# Altium PCB 8088NoteBook2.PcbDoc
Units mil, origin at the board's own origin, x right, y up, seen from the top; angles counter-clockwise.
Board outline 25980 x 22460 mil, 2 copper layers (Top Layer, Bottom Layer); 46 components, 99 nets, 506 pads, 177 vias.
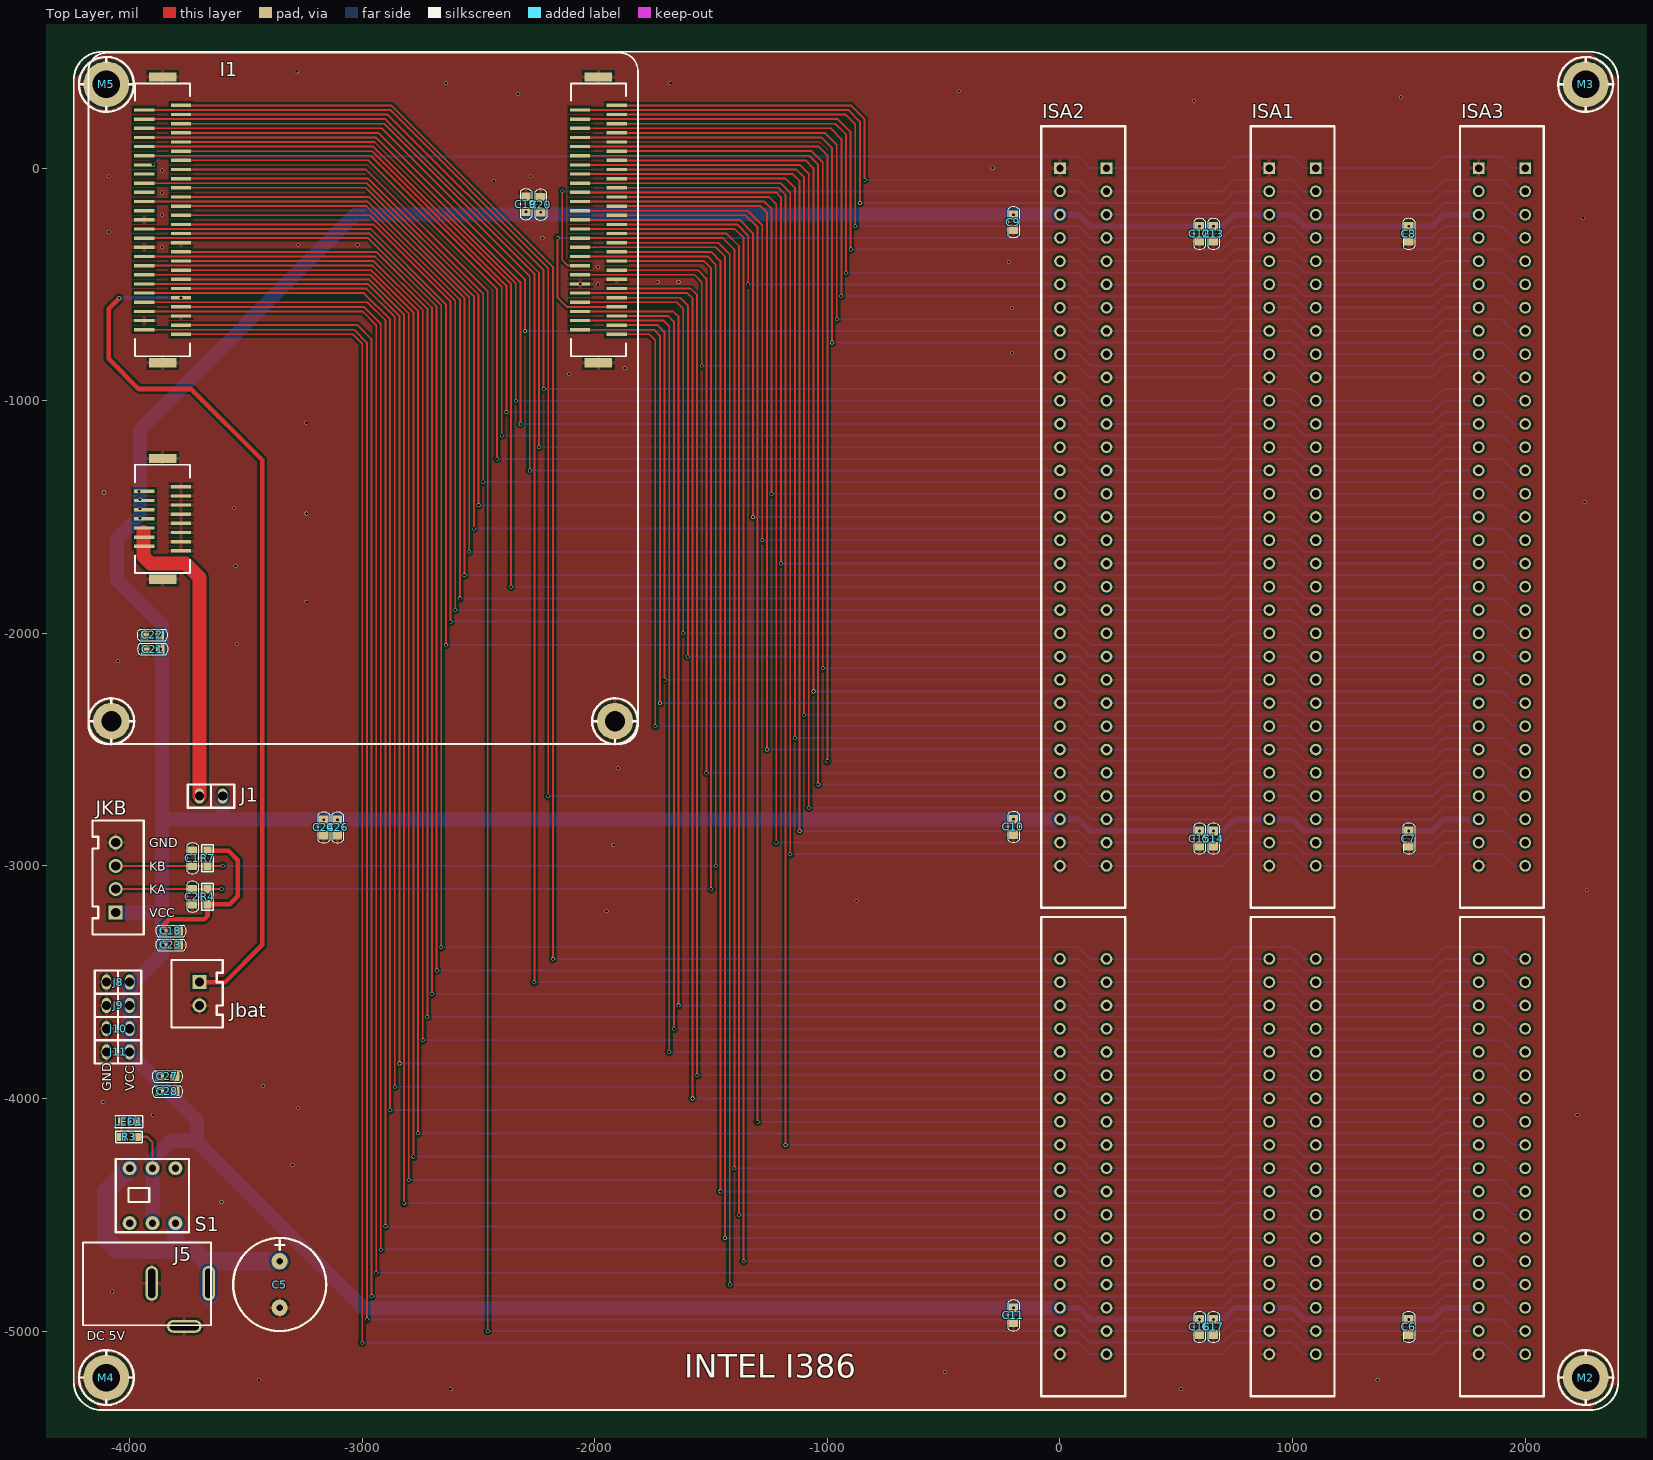
[diagram p0: Top Layer view]
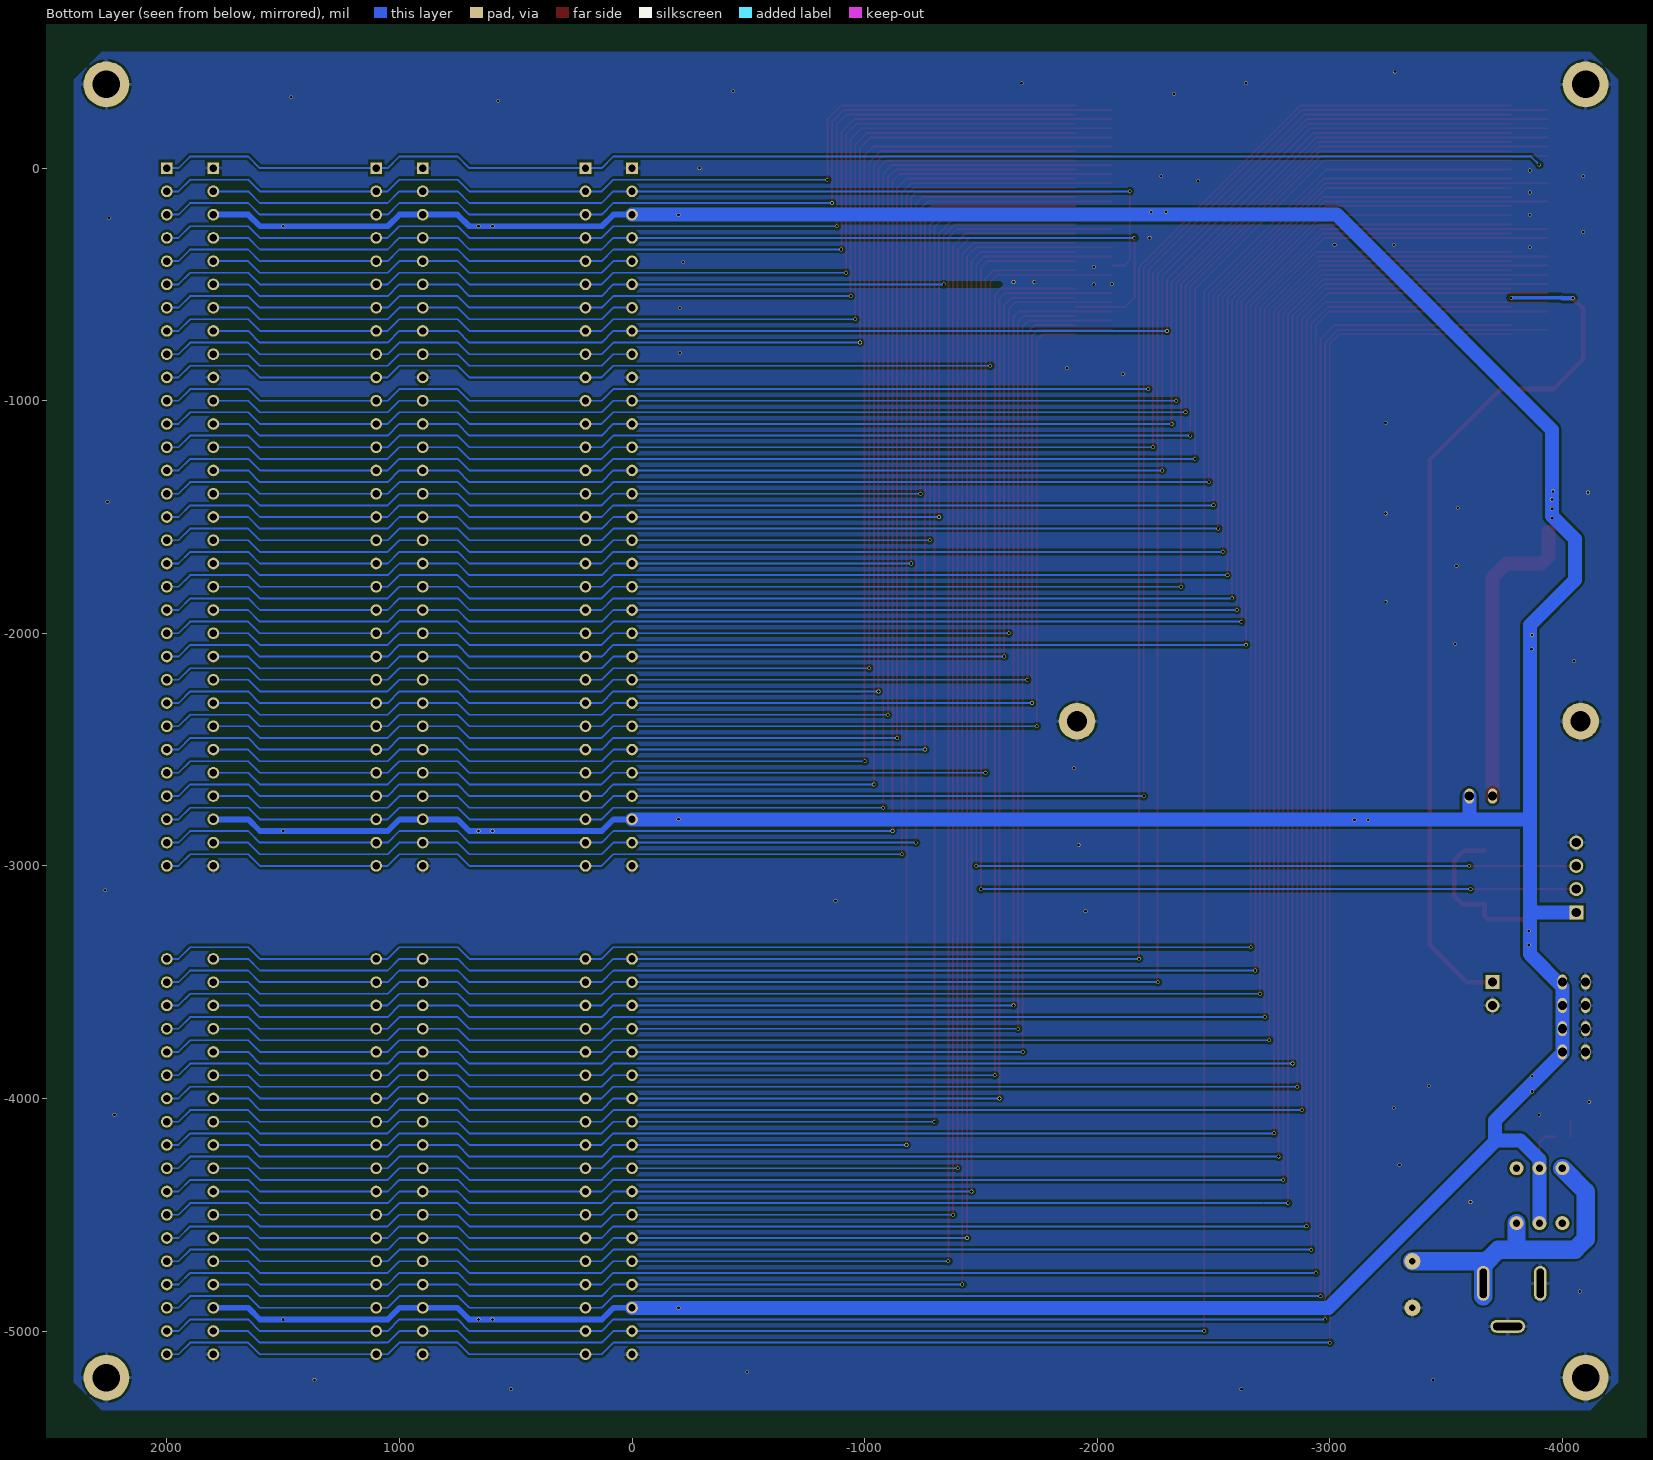
[diagram p1: Bottom Layer view, seen from below]

## Layer stack, top to bottom
Top Layer: signal copper 1.4
Dielectric: core 12.6, FR-4, Dk 4.8
Bottom Layer: signal copper 1.4

## Board outline
-12416.69,-16576.02 -12386.69,-16606.02 13563.31,-16606.02 13563.31,5523.98 13233.31,5853.98 12773.31,5393.98 -12086.69,5393.98

## Design rules (kind name [scope] priority, off if disabled: settings)
Clearance [All] p1: gap=8
ComponentClearance [All] p1: gap=10 collisioncheckmode=3 verticalgap=10
HoleSize [All] p1: absolutevalues=TRUE maxlimit=300 minlimit=11.81 maxpercent=80.000 minpercent=20.000
PlaneClearance [All] p1: clearance=15.75
PlaneConnect [All] p1: planeconnectstyle=Direct reliefexpansion=20 reliefentries=4 reliefconductorwidth=10 reliefairgap=10
PolygonConnect [All] p1: connectstyle=Relief reliefconductorwidth=15.75 reliefentries=4 polygonreliefangle="90 Angle"
RoutingVias [All] p1: holewidth=11.81 width=15.75 viastyle="Through Hole" minholewidth=11.81 minwidth=15.75 maxholewidth=11.81 maxwidth=15.75
SolderMaskExpansion [All] p1: expansion=4
TestPointUsage [All] p1: valid=0 allowmultiple=FALSE
Testpoint [All] p1: side=15 testpointundercomponent=TRUE minsize=40 maxsize=100 preferedsize=60 minholesize=0 maxholesize=40 preferedholesize=32 testpointgrid=1 style=1023 order=0123456789
Width [All] p1: maxlimit=393.7 minlimit=7.87 preferedwidth=10 toplayer_prefwidth=7.87 bottomlayer_prefwidth=7.87 minimp=50.000000 maximp=50.000000 favimp=50.000000
15 further rules are at their usual default settings.

## Components (designator, comment, footprint, x,y, rotation, side; value= is the part's Value field where it differs from the comment)
C1 "47pf" C0603 -3730,-3000 r90 top
C2 "47pf" C0603 -3730,-3100 r270 top
C5 "CAP1" RB.2/.4 -3355,-4800 r90 top
C6 "CAP" C0603 1500,-4950 r270 top
C7 "CAP" C0603 1500,-2850 r270 top
C8 "CAP" C0603 1500,-250 r270 top
C9 "CAP" C0603 -200,-200 r270 top
C10 "CAP" C0603 -200,-2800 r270 top
C11 "CAP" C0603 -200,-4900 r270 top
C12 "CAP" C0603 600,-250 r270 top
C13 "CAP" C0603 660,-250 r270 top
C14 "CAP" C0603 660,-2850 r270 top
C15 "CAP" C0603 600,-2850 r270 top
C16 "CAP" C0603 600,-4950 r270 top
C17 "CAP" C0603 660,-4950 r270 top
C18 "CAP" C0603 -3855,-3280 r0 top
C19 "CAP" C0603 -2295.94,-187.91 r90 top
C20 "CAP" C0603 -2232.95,-189.88 r90 top
C21 "CAP" C0603 -3867.8,-2068.23 r180 top
C22 "CAP" C0603 -3869.76,-2007.2 r180 top
C23 "CAP" C0603 -3855,-3340 r0 top
C24 "CAP" C0603 -3165.31,-2802.24 r270 top
C26 "CAP" C0603 -3106.26,-2802.24 r270 top
C27 "CAP" C0603 -3870,-3905 r0 top
C28 "CAP" C0603 -3870,-3970 r0 top
I1 "ALD386V10" MY-ALD386V10 -4078.74,-2377.95 r0 top
ISA1 "ISA" MY-ISA16-98 1100,0 r0 top
ISA2 "ISA" MY-ISA16-98 200,0 r0 top
ISA3 "ISA" MY-ISA16-98 2000,0 r0 top
J1 "CON2" SIP2 -3700,-2700 r0 top
J5 "DCIN" DC5.5-2.5 -3765,-4980 r0 top
J8 "CON2" SIP2 -4000,-3500 r180 top
J9 "CON2" SIP2 -4000,-3600 r180 top
J10 "CON2" SIP2 -4000,-3700 r180 top
J11 "CON2" SIP2 -4000,-3800 r180 top
Jbat "CON2" XH2.54-2 -3700,-3500 r270 top
JKB "CON4" XH2.54-4 -4060,-3200 r90 top
LED1 "POWER" LED0603 -4035,-4100 r0 top
M2 "CON1" M3 2260,-5200 r0 top
M3 "CON1" M3 2260,360 r0 top
M4 "CON1" M3 -4100,-5200 r0 top
M5 "CON1" M3 -4100,360 r0 top
R3 "10k" R0603 -4035,-4165 r0 top
R4 "22k" R0603 -3665,-3100 r270 top
R7 "22k" R0603 -3665,-3000 r90 top
S1 "POWER" "SW 8x8" -4000,-4300 r270 top

## Footprints (in the part's own frame and the unit in brackets; to place one, negate y for a bottom-side part, rotate by r counter-clockwise, add the part's x,y. Pads: shape width x height; smd on the part's side, far side on the other; paste and mask are expansions set on the pad)
C0603 [mil]
  rect 37.01x40 smd: 1(0,0)
  rect 37x40 smd: 2(64.98,0)
  silkscreen extent -34,-25 98,25
DC5.5-2.5 [mm]
  oval 1.4x3.8 hole 0.8 slot 3.2 at 90 deg: 1(2.667,4.699) 3(-3.556,4.699)
  oval 3.8x1.4 hole 0.8 slot 3.2 at 0 deg: 2(0,0)
  silkscreen extent -11.05,0.13 2.92,9.14
LED0603 [mm]
  rect 0.8x0.9 smd: 1(0,0) 2(1.7,0)
  silkscreen extent -0.68,-0.64 2.32,0.64
M3 [mm]
  round 5 hole 3: 1(0,0)
  silkscreen extent -3,-3 3,3
MY-ALD386V10 [mm]
  round 4 hole 2.2: 0(0,0) 0(55,0)
  rect 3x1 smd: 0(5.6,28.7) 0(5.6,15.5) 0(5.6,39.15) 0(5.6,70.35) 0(53.2,39.15) 0(53.2,70.35)
  rect 2.2x0.36 smd: 1(7.6,42.25) 2(7.6,43.25) 3(7.6,44.25) 4(7.6,45.25) 5(7.6,46.25) 6(7.6,47.25) 7(7.6,48.25) 8(7.6,49.25) 9(7.6,50.25) 10(7.6,51.25) 11(7.6,52.25) 12(7.6,53.25) 13(7.6,54.25) 14(7.6,55.25) 15(7.6,56.25) 16(7.6,57.25) 17(7.6,58.25) 18(7.6,59.25) 19(7.6,60.25) 20(7.6,61.25) 21(7.6,62.25) 22(7.6,63.25) 23(7.6,64.25) 24(7.6,65.25) 25(7.6,66.25) 26(7.6,67.25) 27(3.6,66.75) 28(3.6,65.75) 29(3.6,64.75) 30(3.6,63.75) 31(3.6,62.75) 32(3.6,61.75) 33(3.6,60.75) 34(3.6,59.75) 35(3.6,58.75) 36(3.6,57.75) 37(3.6,56.75) 38(3.6,55.75) 39(3.6,54.75) 40(3.6,53.75) 41(3.6,52.75) 42(3.6,51.75) 43(3.6,50.75) 44(3.6,49.75) 45(3.6,48.75) 46(3.6,47.75) 47(3.6,46.75) 48(3.6,45.75) 49(3.6,44.75) 50(3.6,43.75) 51(3.6,42.75) A1(55.2,42.25) A2(55.2,43.25) A3(55.2,44.25) A4(55.2,45.25) A5(55.2,46.25) A6(55.2,47.25) A7(55.2,48.25) A8(55.2,49.25) A9(55.2,50.25) A10(55.2,51.25) A11(55.2,52.25) A12(55.2,53.25) A13(55.2,54.25) A14(55.2,55.25) A15(55.2,56.25) A16(55.2,57.25) A17(55.2,58.25) A18(55.2,59.25) A19(55.2,60.25) A20(55.2,61.25) A21(55.2,62.25) A22(55.2,63.25) A23(55.2,64.25) A24(55.2,65.25) A25(55.2,66.25) A26(55.2,67.25) A27(51.2,66.75) A28(51.2,65.75) A29(51.2,64.75) A30(51.2,63.75) A31(51.2,62.75) A32(51.2,61.75) A33(51.2,60.75) A34(51.2,59.75) A35(51.2,58.75) A36(51.2,57.75) A37(51.2,56.75) A38(51.2,55.75) A39(51.2,54.75) A40(51.2,53.75) A41(51.2,52.75) A42(51.2,51.75) A43(51.2,50.75) A44(51.2,49.75) A45(51.2,48.75) A46(51.2,47.75) A47(51.2,46.75) A48(51.2,45.75) A49(51.2,44.75) A50(51.2,43.75) A51(51.2,42.75) B1(7.6,18.6) B2(7.6,19.6) B3(7.6,20.6) B4(7.6,21.6) B5(7.6,22.6) B6(7.6,23.6) B7(7.6,24.6) B8(7.6,25.6) B9(3.6,25.1) B10(3.6,24.1) B11(3.6,23.1) B12(3.6,22.1) B13(3.6,21.1) B14(3.6,20.1) B15(3.6,19.1)
  silkscreen extent -2.5,-2.51 57.5,73
MY-ISA16-98 [mm]
  rect 1.27x1.27 hole 0.8: A01(0,0) B01(-5.08,0)
  round 1.27 hole 0.8: A02(0,-2.54) A03(0,-5.08) A04(0,-7.62) A05(0,-10.16) A06(0,-12.7) A07(0,-15.24) A08(0,-17.78) A09(0,-20.32) A10(0,-22.86) A11(0,-25.4) A12(0,-27.94) A13(0,-30.48) A14(0,-33.02) A15(0,-35.56) A16(0,-38.1) A17(0,-40.64) A18(0,-43.18) A19(0,-45.72) A20(0,-48.26) A21(0,-50.8) A22(0,-53.34) A23(0,-55.88) A24(0,-58.42) A25(0,-60.96) A26(0,-63.5) A27(0,-66.04) A28(0,-68.58) A29(0,-71.12) A30(0,-73.66) A31(0,-76.2) B02(-5.08,-2.54) B03(-5.08,-5.08) B04(-5.08,-7.62) B05(-5.08,-10.16) B06(-5.08,-12.7) B07(-5.08,-15.24) B08(-5.08,-17.78) B09(-5.08,-20.32) B10(-5.08,-22.86) B11(-5.08,-25.4) B12(-5.08,-27.94) B13(-5.08,-30.48) B14(-5.08,-33.02) B15(-5.08,-35.56) B16(-5.08,-38.1) B17(-5.08,-40.64) B18(-5.08,-43.18) B19(-5.08,-45.72) B20(-5.08,-48.26) B21(-5.08,-50.8) B22(-5.08,-53.34) B23(-5.08,-55.88) B24(-5.08,-58.42) B25(-5.08,-60.96) B26(-5.08,-63.5) B27(-5.08,-66.04) B28(-5.08,-68.58) B29(-5.08,-71.12) B30(-5.08,-73.66) B31(-5.08,-76.2) C1(0,-86.36) C2(0,-88.9) C3(0,-91.44) C4(0,-93.98) C5(0,-96.52) C6(0,-99.06) C7(0,-101.6) C8(0,-104.14) C9(0,-106.68) C10(0,-109.22) C11(0,-111.76) C12(0,-114.3) C13(0,-116.84) C14(0,-119.38) C15(0,-121.92) C16(0,-124.46) C17(0,-127) C18(0,-129.54) D1(-5.08,-86.36) D2(-5.08,-88.9) D3(-5.08,-91.44) D4(-5.08,-93.98) D5(-5.08,-96.52) D6(-5.08,-99.06) D7(-5.08,-101.6) D8(-5.08,-104.14) D9(-5.08,-106.68) D10(-5.08,-109.22) D11(-5.08,-111.76) D12(-5.08,-114.3) D13(-5.08,-116.84) D14(-5.08,-119.38) D15(-5.08,-121.92) D16(-5.08,-124.46) D17(-5.08,-127) D18(-5.08,-129.54)
  silkscreen extent -7.11,-134.11 2.03,4.57
R0603 [mil]
  rect 38x35 smd: 1(0,0) 2(65,0)
  silkscreen extent -25,-25 90,25
RB.2/.4 [mil]
  round 70 hole 28: 1(100,0) 2(-100,0)
  silkscreen extent -200,-200 200,200
SIP2 [mil]
  oval 40x65 hole 39.37: 1(0,0) 2(100,0)
  silkscreen extent -50,-50 150,50
"SW 8x8" [mm]
  round 1.524 hole 0.8: 1(0,5) 2(0,2.5) 3(0,0) 4(6,0) 5(6,2.5) 6(6,5)
  silkscreen extent -1.02,-1.52 6.98,6.48
XH2.54-2 [mil]
  rect 60x60 hole 39.37: 1(0,0)
  round 60 hole 39.37: 2(100,0)
  silkscreen extent -95,-120 195,100
XH2.54-4 [mil]
  rect 60x60 hole 39.37: 1(0,0)
  round 60 hole 39.37: 2(100,0) 3(200,0) 4(300,0)
  silkscreen extent -95,-120 395,100

## Part data
C1 C2 C5: library part CAP
J5: "Connector"
LED1: library part LED
R3 R4 R7: library part RES2
S1: library part 双刀双柄开关

## Via types
v1: diameter 15.75, hole 11.81, Top Layer to Bottom Layer, 176 vias
v2: diameter 15, hole 11.81, Top Layer to Bottom Layer, 1 vias

## Nets (pads, with @x,y where several pads share a name; then routed paths per layer and width w, separated by ;. In a path a pad name is that pad's centre, name@x,y a point inside that pad or via, vN(x,y) a via of type N, cw(c..) or ccw(c..) an arc to the next point about the centre after c; other vN are vias at no path point)
12V: ISA1.B09 ISA2.B09 ISA3.B09 | length 1882.8
  Bottom Layer w7.87: ISA2.B09 80,-800 130,-850 700,-850 750,-800 1000,-800 1050,-850 1600,-850 1650,-800 ISA3.B09
206_VCC: I1.5 Jbat.1 | length 3806.8
  Top Layer w20: v1(-4045,-560) -4090,-605 -4090,-820 -3960,-950 -3735,-950 -3430,-1255 -3430,-3340 -3590,-3500 Jbat.1
  Bottom Layer w15: -3997.09,-557.09 v2(-3779.53,-557.09)
  Bottom Layer w20: v1(-4045,-560) -4000,-560 -3997.09,-557.09
-5V: ISA1.B05 ISA2.B05 ISA3.B05 | length 1882.8
  Bottom Layer w7.87: ISA2.B05 80,-400 130,-450 700,-450 750,-400 1000,-400 1050,-450 1600,-450 1650,-400 ISA3.B05
-12V: ISA1.B07 ISA2.B07 ISA3.B07 | length 1882.8
  Bottom Layer w7.87: ISA2.B07 80,-600 130,-650 700,-650 750,-600 1000,-600 1050,-650 1600,-650 1650,-600 ISA3.B07
DCIN: C5.1 J5.1 S1.3 S1.6 | length 1394.9
  Bottom Layer w7.87: -3675,-4700 -3674.09,-4700
  Bottom Layer w78.74: S1.3 -4100,-4400 -4100,-4605 -4055,-4650 -3725,-4650 -3660,-4715 J5.1@-3660,-4850 ; -3803.15,-4644.09 S1.6 ; -3674.09,-4700 C5.1
GND: C1.2 C2.2 C5.2 C6.2 C7.2 C8.2 C9.2 C10.2 C11.2 C12.2 C13.2 C14.2 C15.2 C16.2 C17.2 C18.2 C19.2 C20.2 C21.2 C22.2 C23.2 C24.2 C26.2 C27.2 C28.2 I1.0 I1.3 I1.11 I1.39 I1.42 I1.50 I1.A7 I1.A22 I1.A46 I1.B1 I1.B2 I1.B3 I1.B4 I1.B5 I1.B6 I1.B7 I1.B8 ISA1.B01 ISA1.B10 ISA1.B31 ISA1.D18 ISA2.B01 ISA2.B10 ISA2.B31 ISA2.D18 ISA3.B01 ISA3.B10 ISA3.B31 ISA3.D18 J5.2 J5.3 J8.2 J9.2 J10.2 J11.2 Jbat.2 JKB.4 LED1.2 M2.1 M3.1 M4.1 M5.1
  other v1: -2620,-5250 520,-5250 -3445,-5210 1365,-5210 -495,-5175 -4075,-4830 -3605,-4445 -3300,-4285 -3900,-4070 2225,-4070 -3275,-4040 -4115,-4015 -3425,-3945 -1950,-3195 -875,-3150 2265,-3105 -1920,-2910 -1900,-2580 -4050,-2120 -3540,-2045 -3240,-1865 -3545,-1710 -3240,-1485 -3550,-1460 2255,-1435 -4110,-1395 -3240,-1095 -2110,-885 -1870,-860 -205,-795 -205,-600 -1985,-500 -2062.99,-498.03 -1730,-490 -1640,-490 -1985,-425 -220,-405 -3860,-340 -3275,-330 -3020,-330 -2225,-300 -4090,-275 2250,-215 -3860,-200 -3860,-105 -2435,-55 -4090,-35 -2275,-35 -3860,-10 -290,0 575,290 1465,305 -2330,320 -435,330 -2640,365 -1675,365 -3280,415
ISA_*DACK0: I1.31 ISA1.B19 ISA2.B19 ISA3.B19 | length 7365.3
  Top Layer w7.87: I1.31 -2952.52,92.52 -2360,-500 v1(-2360,-1800)
  Bottom Layer w7.87: v1(-2360,-1800) 80,-1800 130,-1850 700,-1850 750,-1800 1000,-1800 1050,-1850 1600,-1850 1650,-1800 ISA3.B19
ISA_*DACK1: I1.A38 ISA1.B17 ISA2.B17 ISA3.B17 | length 5326.5
  Top Layer w7.87: I1.A38 -1341.93,-183.07 -1280,-245 v1(-1280,-1600)
  Bottom Layer w7.87: v1(-1280,-1600) 80,-1600 130,-1650 700,-1650 750,-1600 1000,-1600 1050,-1650 1600,-1650 1650,-1600 ISA3.B17
ISA_*DACK2: I1.A15 ISA1.B26 ISA2.B26 ISA3.B26 | length 6109.4
  Top Layer w7.87: I1.A15 -1286.61,-163.39 -1260,-190 v1(-1260,-2500)
  Bottom Layer w7.87: v1(-1260,-2500) 80,-2500 130,-2550 700,-2550 750,-2500 1000,-2500 1050,-2550 1600,-2550 1650,-2500 ISA3.B26
ISA_*DACK3: I1.A37 ISA1.B15 ISA2.B15 ISA3.B15 | length 5183.8
  Top Layer w7.87: I1.A37 -1271.3,-143.7 -1240,-175 v1(-1240,-1400)
  Bottom Layer w7.87: v1(-1240,-1400) 80,-1400 130,-1450 700,-1450 750,-1400 1000,-1400 1050,-1450 1600,-1450 1650,-1400 ISA3.B15
ISA_*IOCHCK: I1.33 ISA1.A01 ISA2.A01 ISA3.A01 | length 6018.1
  Bottom Layer w7.87: v1(-3900,15) -3865,50 80,50 130,0 700,0 750,50 1000,50 1050,0 1600,0 1650,50 1900,50 1950,0 ISA3.A01
ISA_*IOR: I1.29 ISA1.B14 ISA2.B14 ISA3.B14 | length 6918.4
  Top Layer w7.87: I1.29 -2916.26,171.26 -2280,-465 v1(-2280,-1300)
  Bottom Layer w7.87: v1(-2280,-1300) 80,-1300 130,-1350 700,-1350 750,-1300 1000,-1300 1050,-1350 1600,-1350 1650,-1300 ISA3.B14
ISA_*IOW: I1.28 ISA1.B13 ISA2.B13 ISA3.B13 | length 6843.5
  Top Layer w7.87: I1.28 -2900.63,210.63 -2240,-450 v1(-2240,-1200)
  Bottom Layer w7.87: v1(-2240,-1200) 80,-1200 130,-1250 700,-1250 750,-1200 1000,-1200 1050,-1250 1600,-1250 1650,-1200 ISA3.B13
ISA_*MEMR: I1.30 ISA1.B12 ISA2.B12 ISA3.B12 | length 6687.4
  Top Layer w7.87: I1.30 -2941.89,131.89 -2320,-490 v1(-2320,-1100)
  Bottom Layer w7.87: v1(-2320,-1100) 80,-1100 130,-1150 700,-1150 750,-1100 1000,-1100 1050,-1150 1600,-1150 1650,-1100 ISA3.B12
ISA_*MEMW: I1.22 ISA1.B11 ISA2.B11 ISA3.B11 | length 6418.9
  Top Layer w7.87: I1.22 -2947.2,112.2 -2340,-495 v1(-2340,-1000)
  Bottom Layer w7.87: v1(-2340,-1000) 80,-1000 130,-1050 700,-1050 750,-1000 1000,-1000 1050,-1050 1600,-1050 1650,-1000 ISA3.B11
ISA_A0: I1.A35 ISA1.A31 ISA2.A31 ISA3.A31 | length 7028.1
  Top Layer w7.87: I1.A35 -1200.04,-64.96 -1160,-105 v1(-1160,-2950)
  Bottom Layer w7.87: v1(-1160,-2950) 80,-2950 130,-3000 700,-3000 750,-2950 1000,-2950 1050,-3000 1600,-3000 1650,-2950 1900,-2950 1950,-3000 ISA3.A31
ISA_A1: I1.A34 ISA1.A30 ISA2.A30 ISA3.A30 | length 6973.7
  Top Layer w7.87: I1.A34 -1149.41,-25.59 -1120,-55 v1(-1120,-2850)
  Bottom Layer w7.87: v1(-1120,-2850) 80,-2850 130,-2900 700,-2900 750,-2850 1000,-2850 1050,-2900 1600,-2900 1650,-2850 1900,-2850 1950,-2900 ISA3.A30
ISA_A2: I1.A33 ISA1.A29 ISA2.A29 ISA3.A29 | length 6907.6
  Top Layer w7.87: I1.A33 -1118.78,13.78 -1080,-25 v1(-1080,-2750)
  Bottom Layer w7.87: v1(-1080,-2750) 80,-2750 130,-2800 700,-2800 750,-2750 1000,-2750 1050,-2800 1600,-2800 1650,-2750 1900,-2750 1950,-2800 ISA3.A29
ISA_A3: I1.A32 ISA1.A28 ISA2.A28 ISA3.A28 | length 6847.3
  Top Layer w8: I1.A32 -1078.15,53.15 -1040,15 v1(-1040,-2650)
  Bottom Layer w7.87: v1(-1040,-2650) 80,-2650 130,-2700 700,-2700 750,-2650 1000,-2650 1050,-2700 1600,-2700 1650,-2650 1900,-2650 1950,-2700 ISA3.A28
ISA_A4: I1.A31 ISA1.A27 ISA2.A27 ISA3.A27 | length 6787.1
  Top Layer w8: I1.A31 -1037.52,92.52 -1000,55 v1(-1000,-2550)
  Bottom Layer w7.87: v1(-1000,-2550) 80,-2550 130,-2600 700,-2600 750,-2550 1000,-2550 1050,-2600 1600,-2600 1650,-2550 1900,-2550 1950,-2600 ISA3.A27
ISA_A5: I1.A18 ISA1.A26 ISA2.A26 ISA3.A26 | length 6390.5
  Top Layer w8: I1.A18 -1179.72,-45.28 -1140,-85 v1(-1140,-2450)
  Bottom Layer w7.87: -1023.62,-2450 80,-2450 130,-2500 700,-2500 750,-2450 1000,-2450 1050,-2500 1600,-2500 1650,-2450 1900,-2450 1950,-2500 ISA3.A26
  Bottom Layer w8: v1(-1140,-2450) -1023.62,-2450
ISA_A6: I1.A19 ISA1.A25 ISA2.A25 ISA3.A25 | length 6333.2
  Top Layer w8: I1.A19 -1134.09,-5.91 -1100,-40 v1(-1100,-2350)
  Bottom Layer w7.87: v1(-1100,-2350) 80,-2350 130,-2400 700,-2400 750,-2350 1000,-2350 1050,-2400 1600,-2400 1650,-2350 1900,-2350 1950,-2400 ISA3.A25
ISA_A7: I1.A20 ISA1.A24 ISA2.A24 ISA3.A24 | length 6272.9
  Top Layer w8: I1.A20 -1093.46,33.46 -1060,0 v1(-1060,-2250)
  Bottom Layer w7.87: -984.25,-2250 80,-2250 130,-2300 700,-2300 750,-2250 1000,-2250 1050,-2300 1600,-2300 1650,-2250 1900,-2250 1950,-2300 ISA3.A24
  Bottom Layer w8: v1(-1060,-2250) -984.25,-2250
ISA_A8: I1.A21 ISA1.A23 ISA2.A23 ISA3.A23 | length 6203.9
  Top Layer w8: I1.A21 -1067.83,72.83 -1020,25 v1(-1020,-2150)
  Bottom Layer w7.87: v1(-1020,-2150) 80,-2150 130,-2200 700,-2200 750,-2150 1000,-2150 1050,-2200 1600,-2200 1650,-2150 1900,-2150 1950,-2200 ISA3.A23
ISA_A9: I1.40 ISA1.A22 ISA2.A22 ISA3.A22 | length 7639.4
  Top Layer w7.87: I1.40 -2963.19,-261.81 -2640,-585 v1(-2640,-2050)
  Bottom Layer w7.87: v1(-2640,-2050) 80,-2050 130,-2100 700,-2100 750,-2050 1000,-2050 1050,-2100 1600,-2100 1650,-2050 1900,-2050 1950,-2100 ISA3.A22
ISA_A10: I1.13 ISA1.A21 ISA2.A21 ISA3.A21 | length 7396
  Top Layer w7.87: I1.13 -2952.87,-242.13 -2620,-575 v1(-2620,-1950)
  Bottom Layer w7.87: v1(-2620,-1950) 80,-1950 130,-2000 700,-2000 750,-1950 1000,-1950 1050,-2000 1600,-2000 1650,-1950 1900,-1950 1950,-2000 ISA3.A21
ISA_A11: I1.15 ISA1.A20 ISA2.A20 ISA3.A20 | length 7334.4
  Top Layer w7.87: I1.15 -2981.61,-163.39 -2580,-565 v1(-2580,-1850)
  Bottom Layer w7.87: v1(-2580,-1850) 80,-1850 130,-1900 700,-1900 750,-1850 1000,-1850 1050,-1900 1600,-1900 1650,-1850 1900,-1850 1950,-1900 ISA3.A20
ISA_A12: I1.37 ISA1.A19 ISA2.A19 ISA3.A19 | length 7403
  Top Layer w7.87: I1.37 -2976.3,-143.7 -2560,-560 v1(-2560,-1750)
  Bottom Layer w7.87: v1(-2560,-1750) 80,-1750 130,-1800 700,-1800 750,-1750 1000,-1750 1050,-1800 1600,-1800 1650,-1750 1900,-1750 1950,-1800 ISA3.A19
ISA_A13: I1.16 ISA1.A18 ISA2.A18 ISA3.A18 | length 7156.6
  Top Layer w7.87: I1.16 -2970.98,-124.02 -2540,-555 v1(-2540,-1650)
  Bottom Layer w7.87: v1(-2540,-1650) 80,-1650 130,-1700 700,-1700 750,-1650 1000,-1650 1050,-1700 1600,-1700 1650,-1650 1900,-1650 1950,-1700 ISA3.A18
ISA_A14: I1.17 ISA1.A17 ISA2.A17 ISA3.A17 | length 7075.8
  Top Layer w7.87: I1.17 -2985.35,-84.65 -2520,-550 v1(-2520,-1550)
  Bottom Layer w7.87: v1(-2520,-1550) 80,-1550 130,-1600 700,-1600 750,-1550 1000,-1550 1050,-1600 1600,-1600 1650,-1550 1900,-1550 1950,-1600 ISA3.A17
ISA_A15: I1.35 ISA1.A16 ISA2.A16 ISA3.A16 | length 7144.4
  Top Layer w7.87: I1.35 -2980.04,-64.96 -2500,-545 v1(-2500,-1450)
  Bottom Layer w7.87: v1(-2500,-1450) 80,-1450 130,-1500 700,-1500 750,-1450 1000,-1450 1050,-1500 1600,-1500 1650,-1450 1900,-1450 1950,-1500 ISA3.A16
ISA_A16: I1.18 ISA1.A15 ISA2.A15 ISA3.A15 | length 6898
  Top Layer w7.87: I1.18 -2974.72,-45.28 -2480,-540 v1(-2480,-1350)
  Bottom Layer w7.87: v1(-2480,-1350) 80,-1350 130,-1400 700,-1400 750,-1350 1000,-1350 1050,-1400 1600,-1400 1650,-1350 1900,-1350 1950,-1400 ISA3.A15
ISA_A17: I1.20 ISA1.A14 ISA2.A14 ISA3.A14 | length 6842.3
  Top Layer w7.87: I1.20 -2973.46,33.46 -2420,-520 v1(-2420,-1250)
  Bottom Layer w7.87: v1(-2420,-1250) 80,-1250 130,-1300 700,-1300 750,-1250 1000,-1250 1050,-1300 1600,-1300 1650,-1250 1900,-1250 1950,-1300 ISA3.A14
ISA_A18: I1.32 ISA1.A13 ISA2.A13 ISA3.A13 | length 6913.8
  Top Layer w7.87: I1.32 -2963.15,53.15 -2400,-510 v1(-2400,-1150)
  Bottom Layer w7.87: v1(-2400,-1150) 80,-1150 130,-1200 700,-1200 750,-1150 1000,-1150 1050,-1200 1600,-1200 1650,-1150 1900,-1150 1950,-1200 ISA3.A13
ISA_A19: I1.21 ISA1.A12 ISA2.A12 ISA3.A12 | length 6667.4
  Top Layer w7.87: I1.21 -2957.83,72.83 -2380,-505 v1(-2380,-1050)
  Bottom Layer w7.87: v1(-2380,-1050) 80,-1050 130,-1100 700,-1100 750,-1050 1000,-1050 1050,-1100 1600,-1100 1650,-1050 1900,-1050 1950,-1100 ISA3.A12
ISA_AEN: I1.25 ISA1.A11 ISA2.A11 ISA3.A11 | length 6670.7
  Top Layer w7.87: I1.25 -2890.31,230.31 -2220,-440 v1(-2220,-950)
  Bottom Layer w7.87: v1(-2220,-950) 80,-950 130,-1000 700,-1000 750,-950 1000,-950 1050,-1000 1600,-1000 1650,-950 1900,-950 1950,-1000 ISA3.A11
ISA_ALE: I1.27 ISA1.B28 ISA2.B28 ISA3.B28 | length 8371.5
  Top Layer w7.87: I1.27 -2880,250 -2200,-430 v1(-2200,-2700)
  Bottom Layer w7.87: v1(-2200,-2700) 80,-2700 130,-2750 700,-2750 750,-2700 1000,-2700 1050,-2750 1600,-2750 1650,-2700 ISA3.B28
ISA_B8: I1.23 ISA1.B08 ISA2.B08 ISA3.B08 | length 6144
  Top Layer w7.87: I1.23 -2931.57,151.57 -2300,-480 v1(-2300,-700)
  Bottom Layer w7.87: v1(-2300,-700) 80,-700 130,-750 700,-750 750,-700 1000,-700 1050,-750 1600,-750 1650,-700 ISA3.B08
ISA_CLK86: I1.14 ISA1.B20 ISA2.B20 ISA3.B20 | length 7144.5
  Top Layer w7.87: I1.14 -2967.24,-202.76 -2600,-570 v1(-2600,-1900)
  Bottom Layer w7.87: v1(-2600,-1900) 80,-1900 130,-1950 700,-1950 750,-1900 1000,-1900 1050,-1950 1600,-1950 1650,-1900 ISA3.B20
ISA_D0: I1.A30 ISA1.A09 ISA2.A09 ISA3.A09 | length 5021
  Top Layer w7.87: I1.A30 -1026.89,131.89 -980,85 v1(-980,-750)
  Bottom Layer w7.87: v1(-980,-750) 80,-750 130,-800 700,-800 750,-750 1000,-750 1050,-800 1600,-800 1650,-750 1900,-750 1950,-800 ISA3.A09
ISA_D1: I1.A23 ISA1.A08 ISA2.A08 ISA3.A08 | length 4780.4
  Top Layer w7.87: I1.A23 -1011.57,151.57 -960,100 v1(-960,-650)
  Bottom Layer w7.87: v1(-960,-650) 80,-650 130,-700 700,-700 750,-650 1000,-650 1050,-700 1600,-700 1650,-650 1900,-650 1950,-700 ISA3.A08
ISA_D2: I1.A29 ISA1.A07 ISA2.A07 ISA3.A07 | length 4860.7
  Top Layer w7.87: I1.A29 -986.26,171.26 -940,125 v1(-940,-550)
  Bottom Layer w7.87: v1(-940,-550) 80,-550 130,-600 700,-600 750,-550 1000,-550 1050,-600 1600,-600 1650,-550 1900,-550 1950,-600 ISA3.A07
ISA_D3: I1.A24 ISA1.A06 ISA2.A06 ISA3.A06 | length 4623.1
  Top Layer w7.87: I1.A24 -965.94,190.94 -920,145 v1(-920,-450)
  Bottom Layer w7.87: v1(-920,-450) 80,-450 130,-500 700,-500 750,-450 1000,-450 1050,-500 1600,-500 1650,-450 1900,-450 1950,-500 ISA3.A06
ISA_D4: I1.A28 ISA1.A05 ISA2.A05 ISA3.A05 | length 4694.6
  Top Layer w7.87: I1.A28 -955.63,210.63 -900,155 v1(-900,-350)
  Bottom Layer w7.87: v1(-900,-350) 80,-350 130,-400 700,-400 750,-350 1000,-350 1050,-400 1600,-400 1650,-350 1900,-350 1950,-400 ISA3.A05
ISA_D5: I1.A25 ISA1.A04 ISA2.A04 ISA3.A04 | length 4465.2
  Top Layer w7.87: I1.A25 -921.26,230.31 -880,189.06 v1(-880,-250)
  Bottom Layer w7.87: v1(-880,-250) 80,-250 130,-300 700,-300 750,-250 1000,-250 1050,-300 1600,-300 1650,-250 1900,-250 1950,-300 ISA3.A04
ISA_D6: I1.A27 ISA1.A03 ISA2.A03 ISA3.A03 | length 4537.3
  Top Layer w7.87: I1.A27 -910,250 -860,200 v1(-860,-150)
  Bottom Layer w7.87: v1(-860,-150) 80,-150 130,-200 700,-200 750,-150 1000,-150 1050,-200 1600,-200 1650,-150 1900,-150 1950,-200 ISA3.A03
ISA_D7: I1.A26 ISA1.A02 ISA2.A02 ISA3.A02 | length 4293.8
  Top Layer w7.87: I1.A26 -899.61,269.69 -840,210.08 v1(-840,-50)
  Bottom Layer w7.87: v1(-840,-50) 80,-50 130,-100 700,-100 750,-50 1000,-50 1050,-100 1600,-100 1650,-50 1900,-50 1950,-100 ISA3.A02
ISA_D8: I1.45 ISA1.C11 ISA2.C11 ISA3.C11 | length 9834.5
  Top Layer w7.87: I1.45 -2966.34,-458.66 -2800,-625 v1(-2800,-4350)
  Bottom Layer w7.87: v1(-2800,-4350) 80,-4350 130,-4400 700,-4400 750,-4350 1000,-4350 1050,-4400 1600,-4400 1650,-4350 1900,-4350 1950,-4400 ISA3.C11
ISA_D9: I1.7 ISA1.C12 ISA2.C12 ISA3.C12 | length 9759.7
  Top Layer w7.87: I1.7 -2971.65,-478.35 -2820,-630 v1(-2820,-4450)
  Bottom Layer w7.87: v1(-2820,-4450) -2720,-4450 ; -2713.78,-4450 80,-4450 130,-4500 700,-4500 750,-4450 1000,-4450 1050,-4500 1600,-4500 1650,-4450 1900,-4450 1950,-4500 ISA3.C12
ISA_D10: I1.48 ISA1.C13 ISA2.C13 ISA3.C13 | length 9968
  Top Layer w7.87: I1.48 -2978.23,-576.77 -2900,-655 v1(-2900,-4550)
  Bottom Layer w7.87: v1(-2900,-4550) 80,-4550 130,-4600 700,-4600 750,-4550 1000,-4550 1050,-4600 1600,-4600 1650,-4550 1900,-4550 1950,-4600 ISA3.C13
ISA_D11: I1.4 ISA1.C14 ISA2.C14 ISA3.C14 | length 9893.5
  Top Layer w7.87: I1.4 -2993.54,-596.46 -2920,-670 v1(-2920,-4650)
  Bottom Layer w7.87: v1(-2920,-4650) 80,-4650 130,-4700 700,-4700 750,-4650 1000,-4650 1050,-4700 1600,-4700 1650,-4650 1900,-4650 1950,-4700 ISA3.C14
ISA_D12: I1.49 ISA1.C15 ISA2.C15 ISA3.C15 | length 10139.9
  Top Layer w7.87: I1.49 -2998.86,-616.14 -2940,-675 v1(-2940,-4750)
  Bottom Layer w7.87: v1(-2940,-4750) 80,-4750 130,-4800 700,-4800 750,-4750 1000,-4750 1050,-4800 1600,-4800 1650,-4750 1900,-4750 1950,-4800 ISA3.C15
ISA_D13: I1.2 ISA1.C16 ISA2.C16 ISA3.C16 | length 10022.9
  Top Layer w7.87: I1.2 -3019.8,-675.2 -2960,-735 v1(-2960,-4850)
  Bottom Layer w7.87: v1(-2960,-4850) 80,-4850 130,-4900 700,-4900 750,-4850 1000,-4850 1050,-4900 1600,-4900 1650,-4850 1900,-4850 1950,-4900 ISA3.C16
ISA_D14: I1.51 ISA1.C17 ISA2.C17 ISA3.C17 | length 10263.4
  Top Layer w7.87: I1.51 -3035.12,-694.88 -2980,-750 v1(-2980,-4950)
  Bottom Layer w7.87: v1(-2980,-4950) 80,-4950 130,-5000 700,-5000 750,-4950 1000,-4950 1050,-5000 1600,-5000 1650,-4950 1900,-4950 1950,-5000 ISA3.C17
ISA_D15: I1.1 ISA1.C18 ISA2.C18 ISA3.C18 | length 10194.8
  Top Layer w7.87: I1.1 -3040.43,-714.57 -3000,-755 v1(-3000,-5050)
  Bottom Layer w7.87: v1(-3000,-5050) 80,-5050 130,-5100 700,-5100 750,-5050 1000,-5050 1050,-5100 1600,-5100 1650,-5050 1900,-5050 1950,-5100 ISA3.C18
ISA_DRQ1: I1.A36 ISA1.B18 ISA2.B18 ISA3.B18 | length 5529.4
  Top Layer w7.87: I1.A36 -1220.67,-104.33 -1200,-125 v1(-1200,-1700)
  Bottom Layer w7.87: v1(-1200,-1700) 80,-1700 130,-1750 700,-1750 750,-1700 1000,-1700 1050,-1750 1600,-1750 1650,-1700 ISA3.B18
ISA_DRQ2: I1.A13 ISA1.B06 ISA2.B06 ISA3.B06 | length 4018.2
  Top Layer w7.87: I1.A13 -1387.87,-242.13 -1340,-290 v1(-1340,-500)
  Bottom Layer w7.87: v1(-1340,-500) 80,-500 130,-550 700,-550 750,-500 1000,-500 1050,-550 1600,-550 1650,-500 ISA3.B06
ISA_DRQ3: I1.A39 ISA1.B16 ISA2.B16 ISA3.B16 | length 5189.7
  Top Layer w7.87: I1.A39 -1377.56,-222.44 -1320,-280 v1(-1320,-1500)
  Bottom Layer w7.87: v1(-1320,-1500) 80,-1500 130,-1550 700,-1550 750,-1500 1000,-1500 1050,-1550 1600,-1550 1650,-1500 ISA3.B16
ISA_IOREADY: I1.A45 ISA1.A10 ISA2.A10 ISA3.A10 | length 4546.4
  Top Layer w7.87: I1.A45 -1571.34,-458.66 -1540,-490 v1(-1540,-850)
  Bottom Layer w7.87: v1@-1546.85,-850 80,-850 130,-900 700,-900 750,-850 1000,-850 1050,-900 1600,-900 1650,-850 1900,-850 1950,-900 ISA3.A10
ISA_IRQ2: I1.A4 ISA1.B04 ISA2.B04 ISA3.B04 | length 4570.4
  Top Layer w7.87: v1(-2160,-300) -2160,-556.46 -2120,-596.46 I1.A4
  Bottom Layer w7.87: v1(-2160,-300) 80,-300 130,-350 700,-350 750,-300 1000,-300 1050,-350 1600,-350 1650,-300 ISA3.B04
ISA_IRQ3: I1.A1 ISA1.B25 ISA2.B25 ISA3.B25 | length 5458.9
  Top Layer w7.87: I1.A1 -1765.43,-714.57 -1740,-740 v1(-1740,-2400)
  Bottom Layer w7.87: v1(-1740,-2400) 80,-2400 130,-2450 700,-2450 750,-2400 1000,-2400 1050,-2450 1600,-2450 1650,-2400 ISA3.B25
ISA_IRQ4: I1.A51 ISA1.B24 ISA2.B24 ISA3.B24 | length 5536.2
  Top Layer w7.87: I1.A51 -1745.12,-694.88 -1720,-720 v1(-1720,-2300)
  Bottom Layer w7.87: v1(-1720,-2300) 80,-2300 130,-2350 700,-2350 750,-2300 1000,-2300 1050,-2350 1600,-2350 1650,-2300 ISA3.B24
ISA_IRQ5: I1.A2 ISA1.B23 ISA2.B23 ISA3.B23 | length 5295.7
  Top Layer w7.87: I1.A2 -1729.8,-675.2 -1700,-705 v1(-1700,-2200)
  Bottom Layer w7.87: v1(-1700,-2200) 80,-2200 130,-2250 700,-2250 750,-2200 1000,-2200 1050,-2250 1600,-2250 1650,-2200 ISA3.B23
ISA_IRQ6: I1.A5 ISA1.B22 ISA2.B22 ISA3.B22 | length 5312
  Top Layer w7.87: I1.A5 -1632.91,-557.09 -1600,-590 v1(-1600,-2100)
  Bottom Layer w7.87: v1(-1600,-2100) 80,-2100 130,-2150 700,-2150 750,-2100 1000,-2100 1050,-2150 1600,-2150 1650,-2100 ISA3.B22
ISA_IRQ7: I1.A48 ISA1.B21 ISA2.B21 ISA3.B21 | length 5352.5
  Top Layer w7.87: I1.A48 -1648.23,-576.77 -1620,-605 v1(-1620,-2000)
  Bottom Layer w7.87: v1(-1620,-2000) 80,-2000 130,-2050 700,-2050 750,-2000 1000,-2000 1050,-2050 1600,-2050 1650,-2000 ISA3.B21
ISA_OSC: I1.A16 ISA1.B30 ISA2.B30 ISA3.B30 | length 6546.2
  Top Layer w8: I1.A16 -1250.98,-124.02 -1220,-155 v1(-1220,-2900)
  Bottom Layer w7.87: v1(-1220,-2900) 80,-2900 130,-2950 700,-2950 750,-2900 1000,-2900 1050,-2950 1600,-2950 1650,-2900 ISA3.B30
ISA_RESET: I1.A44 ISA1.B02 ISA2.B02 ISA3.B02 | length 4404.9
  Top Layer w7.87: v1(-2140,-100) -2140,-395 -2115.71,-419.29 I1.A44
  Bottom Layer w7.87: v1(-2140,-100) 80,-100 130,-150 700,-150 750,-100 1000,-100 1050,-150 1600,-150 1650,-100 ISA3.B02
ISA_T/C: I1.A8 ISA1.B27 ISA2.B27 ISA3.B27 | length 5928.3
  Top Layer w7.87: I1.A8 -1556.02,-438.98 -1520,-475 v1(-1520,-2600)
  Bottom Layer w7.87: v1(-1520,-2600) 80,-2600 130,-2650 700,-2650 750,-2600 1000,-2600 1050,-2650 1600,-2650 1650,-2600 ISA3.B27
ISAC_*BHE: I1.12 ISA1.C1 ISA2.C1 ISA3.C1 | length 8770.9
  Top Layer w7.87: I1.12 -2968.5,-281.5 -2660,-590 v1(-2660,-3350)
  Bottom Layer w7.87: v1(-2660,-3350) 80,-3350 130,-3400 700,-3400 750,-3350 1000,-3350 1050,-3400 1600,-3400 1650,-3350 1900,-3350 1950,-3400 ISA3.C1
ISAC_*MEMR: I1.44 ISA1.C9 ISA2.C9 ISA3.C9 | length 9656.6
  Top Layer w7.87: I1.44 -2955.71,-419.29 -2760,-615 v1(-2760,-4150)
  Bottom Layer w7.87: v1(-2760,-4150) 80,-4150 130,-4200 700,-4200 750,-4150 1000,-4150 1050,-4200 1600,-4200 1650,-4150 1900,-4150 1950,-4200 ISA3.C9
ISAC_*MEMW: I1.8 ISA1.C10 ISA2.C10 ISA3.C10 | length 9588.1
  Top Layer w7.87: I1.8 -2961.02,-438.98 -2780,-620 v1(-2780,-4250)
  Bottom Layer w7.87: v1(-2780,-4250) 80,-4250 130,-4300 700,-4300 750,-4250 1000,-4250 1050,-4300 1600,-4300 1650,-4250 1900,-4250 1950,-4300 ISA3.C10
ISAC_A17: I1.47 ISA1.C8 ISA2.C8 ISA3.C8 | length 9487.2
  Top Layer w7.87: I1.47 -2992.6,-537.4 -2880,-650 v1(-2880,-4050)
  Bottom Layer w7.87: v1(-2880,-4050) 80,-4050 130,-4100 700,-4100 750,-4050 1000,-4050 1050,-4100 1600,-4100 1650,-4050 1900,-4050 1950,-4100 ISA3.C8
ISAC_A18: I1.6 ISA1.C7 ISA2.C7 ISA3.C7 | length 9243.7
  Top Layer w7.87: I1.6 -2982.28,-517.72 -2860,-640 v1(-2860,-3950)
  Bottom Layer w7.87: v1(-2860,-3950) 80,-3950 130,-4000 700,-4000 750,-3950 1000,-3950 1050,-4000 1600,-4000 1650,-3950 1900,-3950 1950,-4000 ISA3.C7
ISAC_A19: I1.46 ISA1.C6 ISA2.C6 ISA3.C6 | length 9312.3
  Top Layer w7.87: I1.46 -2976.97,-498.03 -2840,-635 v1(-2840,-3850)
  Bottom Layer w7.87: v1(-2840,-3850) 80,-3850 130,-3900 700,-3900 750,-3850 1000,-3850 1050,-3900 1600,-3900 1650,-3850 1900,-3850 1950,-3900 ISA3.C6
ISAC_A20: I1.9 ISA1.C5 ISA2.C5 ISA3.C5 | length 9110.2
  Top Layer w7.87: I1.9 -2950.39,-399.61 -2740,-610 v1(-2740,-3750)
  Bottom Layer w7.87: v1(-2740,-3750) 80,-3750 130,-3800 700,-3800 750,-3750 1000,-3750 1050,-3800 1600,-3800 1650,-3750 1900,-3750 1950,-3800 ISA3.C5
ISAC_A21: I1.43 ISA1.C4 ISA2.C4 ISA3.C4 | length 9178.8
  Top Layer w7.87: I1.43 -2945.08,-379.92 -2720,-605 v1(-2720,-3650)
  Bottom Layer w7.87: v1(-2720,-3650) 80,-3650 130,-3700 700,-3700 750,-3650 1000,-3650 1050,-3700 1600,-3700 1650,-3650 1900,-3650 1950,-3700 ISA3.C4
ISAC_A22: I1.10 ISA1.C3 ISA2.C3 ISA3.C3 | length 8932.4
  Top Layer w7.87: I1.10 -2939.76,-360.24 -2700,-600 v1(-2700,-3550)
  Bottom Layer w7.87: v1(-2700,-3550) 80,-3550 130,-3600 700,-3600 750,-3550 1000,-3550 1050,-3600 1600,-3600 1650,-3550 1900,-3550 1950,-3600 ISA3.C3
ISAC_A23: I1.41 ISA1.C2 ISA2.C2 ISA3.C2 | length 9017.3
  Top Layer w7.87: I1.41 -2973.82,-301.18 -2680,-595 v1(-2680,-3450)
  Bottom Layer w7.87: v1(-2680,-3450) 80,-3450 130,-3500 700,-3500 750,-3450 1000,-3450 1050,-3500 1600,-3500 1650,-3450 1900,-3450 1950,-3500 ISA3.C2
ISAD_*DACK0: I1.A14 ISA1.D8 ISA2.D8 ISA3.D8 | length 7655
  Top Layer w7.87: I1.A14 -1352.24,-202.76 -1300,-255 v1(-1300,-4100)
  Bottom Layer w7.87: v1(-1300,-4100) 80,-4100 130,-4150 700,-4150 750,-4100 1000,-4100 1050,-4150 1600,-4150 1650,-4100 ISA3.D8
ISAD_*DACK5: I1.A41 ISA1.D10 ISA2.D10 ISA3.D10 | length 7916.1
  Top Layer w7.87: I1.A41 -1448.82,-301.18 -1400,-350 v1(-1400,-4300)
  Bottom Layer w7.87: v1(-1400,-4300) 80,-4300 130,-4350 700,-4350 750,-4300 1000,-4300 1050,-4350 1600,-4350 1650,-4300 ISA3.D10
ISAD_*DACK6: I1.A12 ISA1.D12 ISA2.D12 ISA3.D12 | length 7975.5
  Top Layer w7.87: I1.A12 -1433.5,-281.5 -1380,-335 v1(-1380,-4500)
  Bottom Layer w7.87: v1(-1380,-4500) 80,-4500 130,-4550 700,-4550 750,-4500 1000,-4500 1050,-4550 1600,-4550 1650,-4500 ISA3.D12
ISAD_*DACK7: I1.A40 ISA1.D14 ISA2.D14 ISA3.D14 | length 8361.7
  Top Layer w7.87: I1.A40 -1398.19,-261.81 -1360,-300 v1(-1360,-4700)
  Bottom Layer w7.87: v1(-1360,-4700) 80,-4700 130,-4750 700,-4750 750,-4700 1000,-4700 1050,-4750 1600,-4750 1650,-4700 ISA3.D14
ISAD_*IOCS16: I1.24 ISA1.D2 ISA2.D2 ISA3.D2 | length 8974.9
  Top Layer w7.87: I1.24 -2905.94,190.94 -2260,-455 v1(-2260,-3500)
  Bottom Layer w7.87: v1(-2260,-3500) 80,-3500 130,-3550 700,-3550 750,-3500 1000,-3500 1050,-3550 1600,-3550 1650,-3500 ISA3.D2
ISAD_*MASTER: I1.19 ISA1.D17 ISA2.D17 ISA3.D17 | length 10349.5
  Top Layer w7.87: I1.19 -2984.09,-5.91 -2460,-530 v1(-2460,-5000)
  Bottom Layer w7.87: v1(-2460,-5000) 80,-5000 130,-5050 700,-5050 750,-5000 1000,-5000 1050,-5050 1600,-5050 1650,-5000 ISA3.D17
ISAD_*MEMCS16: I1.26 ISA1.D1 ISA2.D1 ISA3.D1 | length 8925.1
  Top Layer w7.87: I1.26 -2874.69,269.69 -2180,-425 v1(-2180,-3400)
  Bottom Layer w7.87: v1(-2180,-3400) 80,-3400 130,-3450 700,-3450 750,-3400 1000,-3400 1050,-3450 1600,-3450 1650,-3400 ISA3.D1
ISAD_DRQ0: I1.A17 ISA1.D9 ISA2.D9 ISA3.D9 | length 7885.9
  Top Layer w7.87: I1.A17 -1210.35,-84.65 -1180,-115 v1(-1180,-4200)
  Bottom Layer w7.87: v1(-1180,-4200) 80,-4200 130,-4250 700,-4250 750,-4200 1000,-4200 1050,-4250 1600,-4250 1650,-4200 ISA3.D9
ISAD_DRQ5: I1.A10 ISA1.D11 ISA2.D11 ISA3.D11 | length 7804.8
  Top Layer w7.87: I1.A10 -1499.76,-360.24 -1460,-400 v1(-1460,-4400)
  Bottom Layer w7.87: v1(-1460,-4400) 80,-4400 130,-4450 700,-4450 750,-4400 1000,-4400 1050,-4450 1600,-4450 1650,-4400 ISA3.D11
ISAD_DRQ6: I1.A42 ISA1.D13 ISA2.D13 ISA3.D13 | length 8182.2
  Top Layer w7.87: I1.A42 -1479.45,-340.55 -1440,-380 v1(-1440,-4600)
  Bottom Layer w7.87: v1(-1440,-4600) 80,-4600 130,-4650 700,-4650 750,-4600 1000,-4600 1050,-4650 1600,-4650 1650,-4600 ISA3.D13
ISAD_DRQ7: I1.A11 ISA1.D15 ISA2.D15 ISA3.D15 | length 8238.7
  Top Layer w7.87: I1.A11 -1469.13,-320.87 -1420,-370 v1(-1420,-4800)
  Bottom Layer w7.87: v1(-1420,-4800) 80,-4800 130,-4850 700,-4850 750,-4800 1000,-4800 1050,-4850 1600,-4850 1650,-4800 ISA3.D15
ISAD_IRQ10: I1.A49 ISA1.D3 ISA2.D3 ISA3.D3 | length 6915.7
  Top Layer w7.87: I1.A49 -1663.86,-616.14 -1640,-640 v1(-1640,-3600)
  Bottom Layer w7.87: v1(-1640,-3600) 80,-3600 130,-3650 700,-3650 750,-3600 1000,-3600 1050,-3650 1600,-3650 1650,-3600 ISA3.D3
ISAD_IRQ11: I1.A3 ISA1.D4 ISA2.D4 ISA3.D4 | length 6838.4
  Top Layer w7.87: I1.A3 -1684.17,-635.83 -1660,-660 v1(-1660,-3700)
  Bottom Layer w7.87: v1(-1660,-3700) 80,-3700 130,-3750 700,-3750 750,-3700 1000,-3700 1050,-3750 1600,-3750 1650,-3700 ISA3.D4
ISAD_IRQ12: I1.A50 ISA1.D5 ISA2.D5 ISA3.D5 | length 7076
  Top Layer w7.87: I1.A50 -1704.49,-655.51 -1680,-680 v1(-1680,-3800)
  Bottom Layer w7.87: v1(-1680,-3800) 80,-3800 130,-3850 700,-3850 750,-3800 1000,-3800 1050,-3850 1600,-3850 1650,-3800 ISA3.D5
ISAD_IRQ14: I1.A47 ISA1.D7 ISA2.D7 ISA3.D7 | length 7395.2
  Top Layer w7.87: I1.A47 -1602.6,-537.4 -1580,-560 v1(-1580,-4000)
  Bottom Layer w7.87: v1(-1580,-4000) 80,-4000 130,-4050 700,-4050 750,-4000 1000,-4000 1050,-4050 1600,-4050 1650,-4000 ISA3.D7
ISAD_IRQ15: I1.A6 ISA1.D6 ISA2.D6 ISA3.D6 | length 7154.7
  Top Layer w7.87: I1.A6 -1587.28,-517.72 -1560,-545 v1(-1560,-3900)
  Bottom Layer w7.87: v1(-1560,-3900) 80,-3900 130,-3950 700,-3950 750,-3900 1000,-3900 1050,-3950 1600,-3950 1650,-3900 ISA3.D6
KEY_A: C2.1 I1.A9 JKB.2 R4.1 | length 5648.1
  Top Layer w7.87: JKB.2 v1(-3605,-3100)
  Top Layer w8: I1.A9 -1530.39,-399.61 -1500,-430 v1(-1500,-3100)
  Bottom Layer w7.87: v1(-3605,-3100) v1(-1500,-3100)
KEY_B: C1.1 I1.A43 JKB.3 R7.1 | length 5762.5
  Top Layer w8: JKB.3 v1(-3600,-3000) ; I1.A43 -1515.08,-379.92 -1480,-415 v1(-1480,-3000)
  Bottom Layer w7.87: v1(-3600,-3000) v1(-1480,-3000)
NetLED1_1: LED1.1 R3.1 | length 65
  Top Layer w10: R3.1 LED1.1
VCC: C6.1 C7.1 C8.1 C9.1 C10.1 C11.1 C12.1 C13.1 C14.1 C15.1 C16.1 C17.1 C18.1 C19.1 C20.1 C21.1 C22.1 C23.1 C24.1 C26.1 C27.1 C28.1 I1.B9 I1.B10 I1.B11 I1.B12 ISA1.B03 ISA1.B29 ISA1.D16 ISA2.B03 ISA2.B29 ISA2.D16 ISA3.B03 ISA3.B29 ISA3.D16 J1.2 J8.1 J9.1 J10.1 J11.1 JKB.1 R3.2 R4.2 R7.2 S1.2 S1.5 | length 22877.6
  Top Layer w10: R3.2 -3925,-4165 -3901.57,-4188.43 S1.2
  Top Layer w20: v1(-3855,-3280) -3855,-3255 -3830,-3230 -3680,-3230 -3665,-3215 R4.2 -3570,-3165 -3535,-3130 -3535,-2975 -3575,-2935 R7.2
  Bottom Layer w25: ISA2.D16 80,-4900 130,-4950 700,-4950 750,-4900 1000,-4900 1050,-4950 1600,-4950 1650,-4900 ISA3.D16 ; ISA2.B29 80,-2800 130,-2850 700,-2850 750,-2800 1000,-2800 1050,-2850 1600,-2850 1650,-2800 ISA3.B29 ; ISA2.B03 80,-200 130,-250 700,-250 750,-200 1000,-200 1050,-250 1600,-250 1650,-200 ISA3.B03
  Bottom Layer w60: JKB.1 -3865,-3200 ; S1.5 -3901.57,-4261.57 -3820,-4180 -3715,-4180 -2995,-4900 ISA2.D16 ; -3840,-2800 ISA2.B29 ; -3710,-4175 -3710,-4095 -4000,-3805 -4000,-3520 -3860,-3380 -3860,-1965 -4055,-1770 -4055,-1595 -3955,-1495 -3955,-1125 -3030,-200 ISA2.B03 ; -3600,-2780 J1.2
  other v1: 600,-4950 660,-4950 1500,-4950 -200,-4900 -3870,-3970 -3870,-3905 -3855,-3340 600,-2850 660,-2850 1500,-2850 -3165.31,-2802.24 -3106.26,-2802.24 -200,-2800 -3867.8,-2068.23 -3869.76,-2007.2 -3955,-1505 -3955,-1465 -3955,-1425 -3960,-1390 600,-250 660,-250 1500,-250 -200,-200 -2232.95,-189.88 -2295.94,-187.91
VCC_CPU: I1.B13 I1.B14 I1.B15 J1.1 | length 1322.3
  Top Layer w60: -3940,-1565 -3940,-1670 -3910,-1700 -3760,-1700 -3700,-1760 J1.1
pads on no net: I1.34 I1.36 I1.38 S1.1 S1.4

## Polygon pours and split planes (outlines as drawn)
GND on Top Layer "Top Layer-No Net 1" (solid, remove dead copper): -4240,-5220 -4120,-5340 2280,-5340 2400,-5220 2400,380 2280,500 -4120,500 -4240,380
GND on Bottom Layer "Top Layer-No Net 1" (solid, remove dead copper): -4240,-5220 -4120,-5340 -4035,-5340 2280,-5340 2400,-5220 2400,380 2280,500 -4120,500 -4240,380

## Silkscreen, mask and mechanical layers (free items; w line width, h text height)
Top Overlay:
  lines w8: -4240,-5220 ccw(c-4120,-5220) -4120,-5340 2280,-5340 ccw(c2280,-5220) 2400,-5220 2400,380 ccw(c2280,380) 2280,500 -4120,500 ccw(c-4120,380) -4240,380 -4240,-5220
  text "GND" at -3915,-2920 h40
  text "KB" at -3915,-3020 h40
  text "KA" at -3915,-3120 h40
  text "VCC" at -3915,-3220 h40
  text "GND" at -4080,-3970 h40 r90
  text "VCC" at -3980,-3970 h40 r90
  text "DC 5V" at -4185,-5040 h40
  text "INTEL I386" at -1615,-5200 h100
Mechanical 1:
  lines w8: -4240,-5220 ccw(c-4120,-5220) -4120,-5340 2280,-5340 ccw(c2280,-5220) 2400,-5220 2400,380 ccw(c2280,380) 2280,500 -4120,500 ccw(c-4120,380) -4240,380 -4240,-5220